# Altium PCB DryBox.PcbDoc
Units mm, origin at the board's own origin, x right, y up, seen from the top; angles counter-clockwise.
Board outline 48.4 x 55.54 mm, 2 copper layers (Top Layer, Bottom Layer); 58 components, 30 nets, 190 pads, 16 vias.
Unrouted connection lines stored in the file: 4.
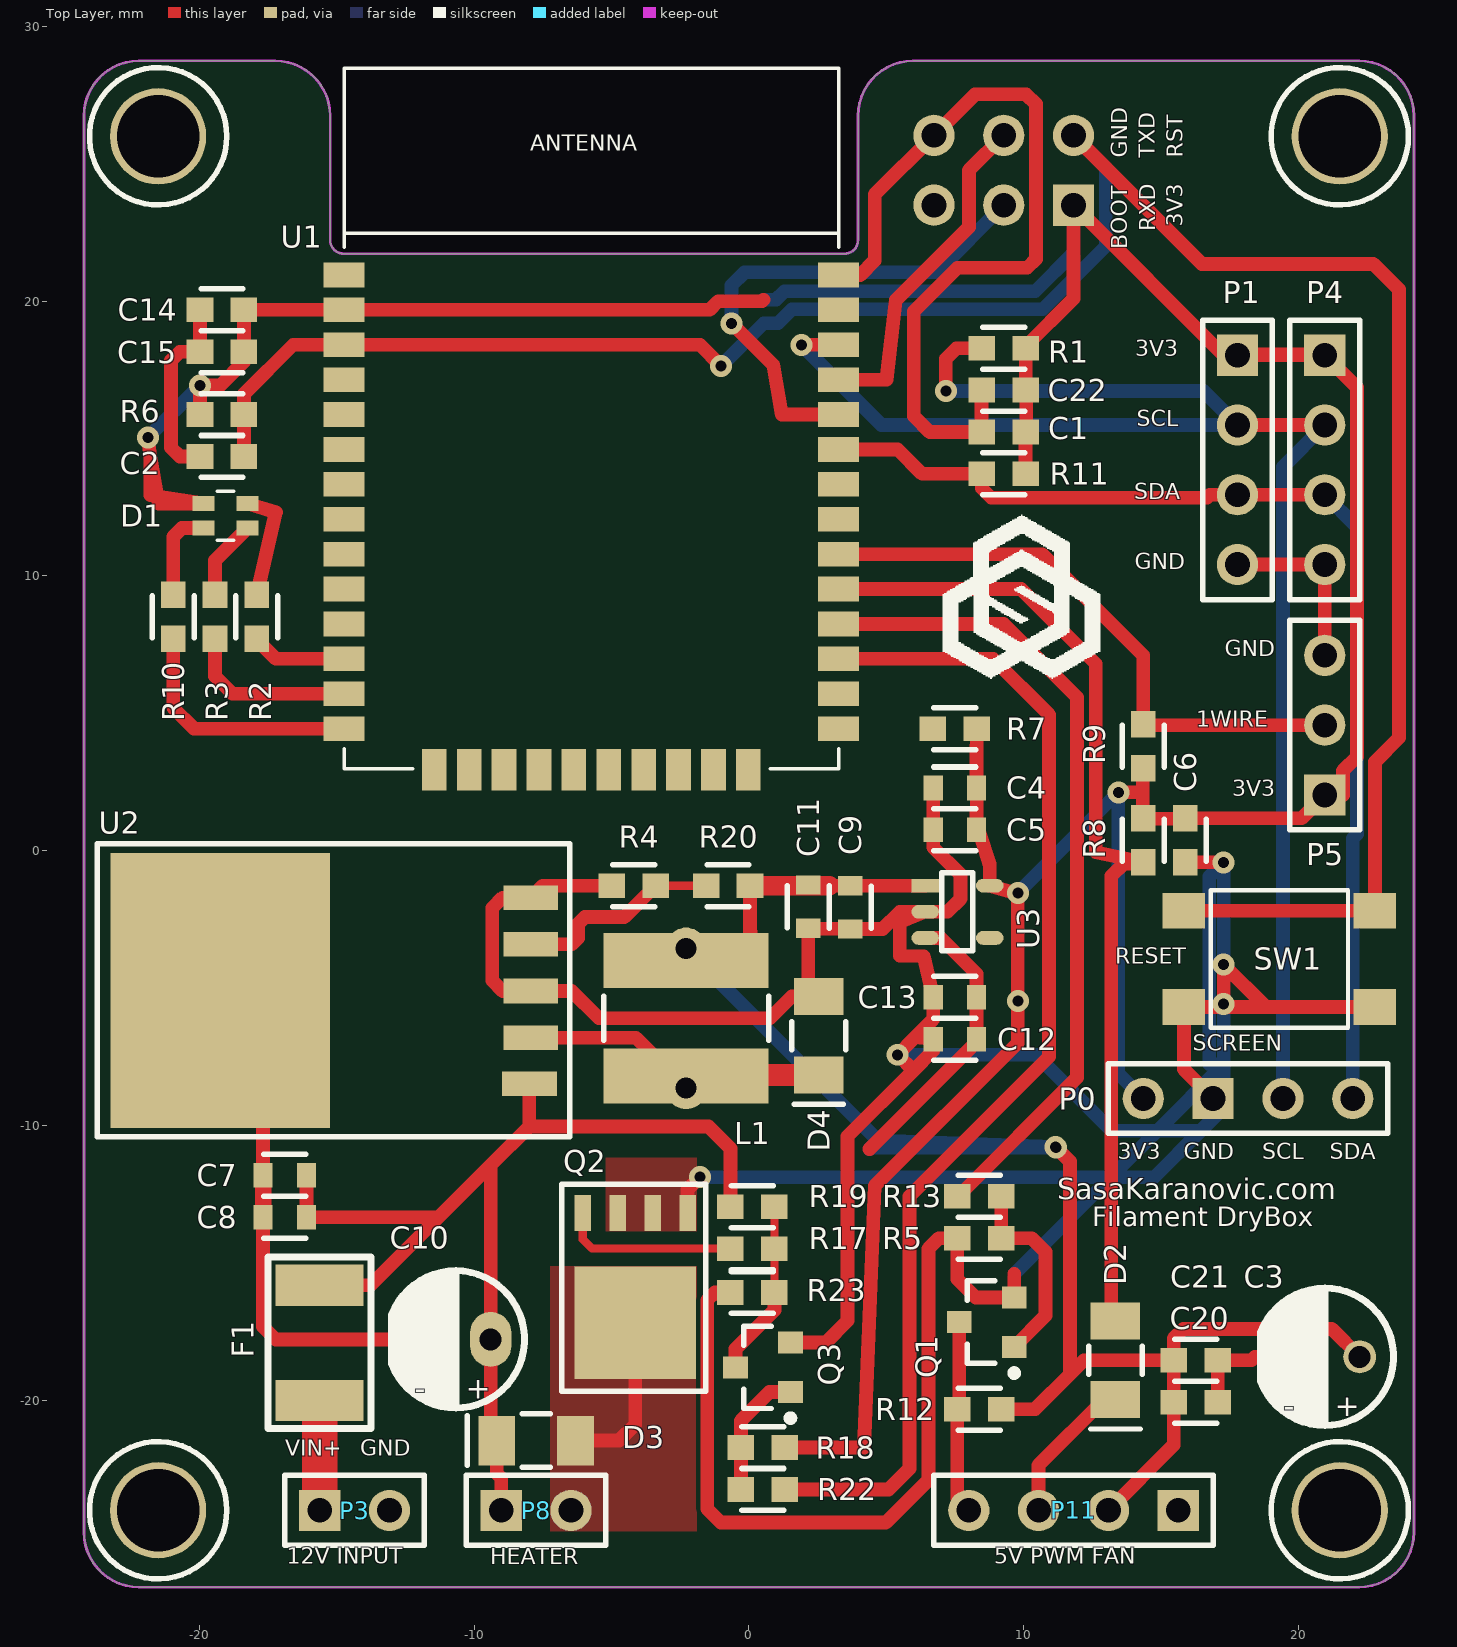
[diagram p0: Top Layer view]
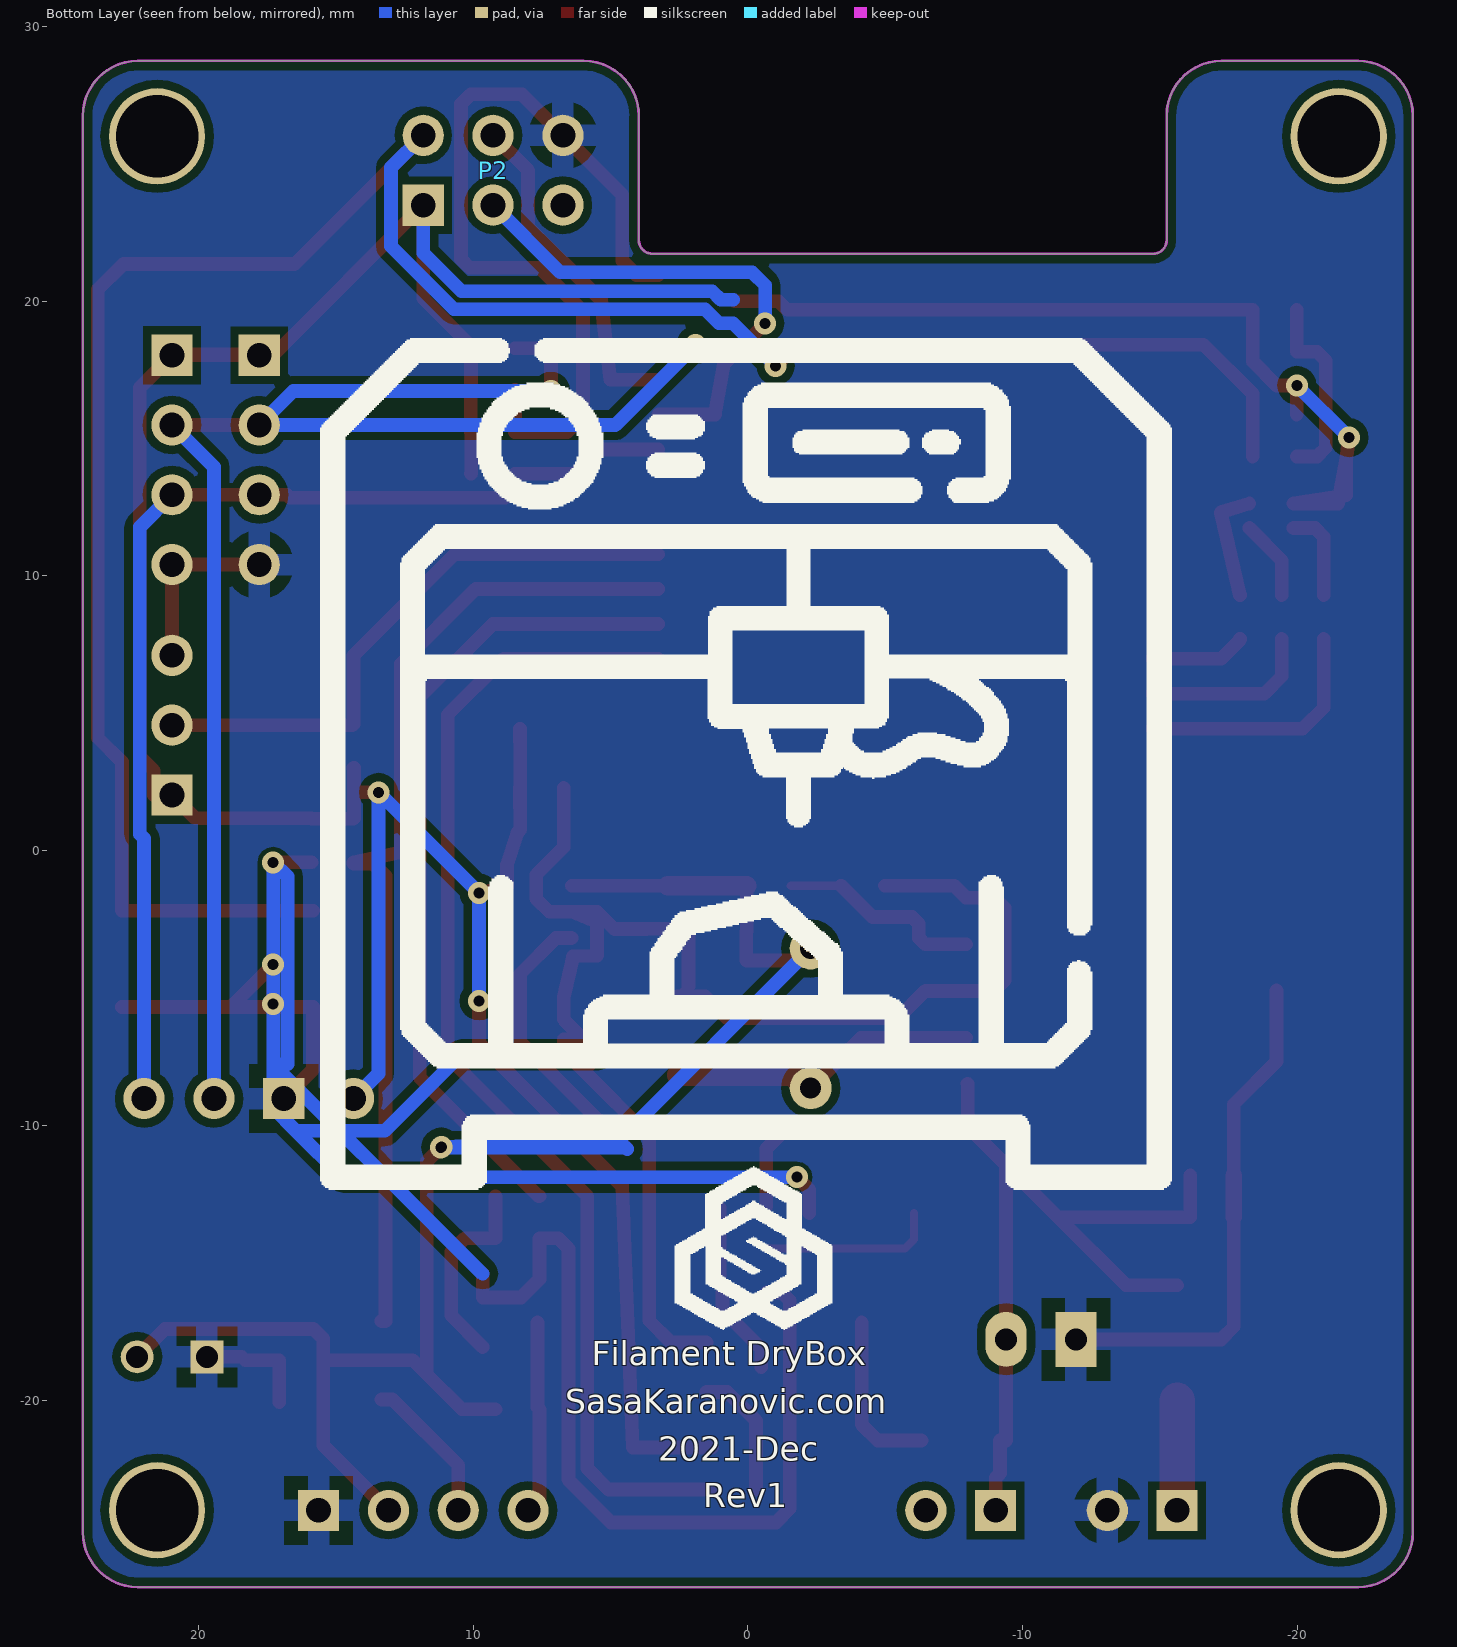
[diagram p1: Bottom Layer view, seen from below]
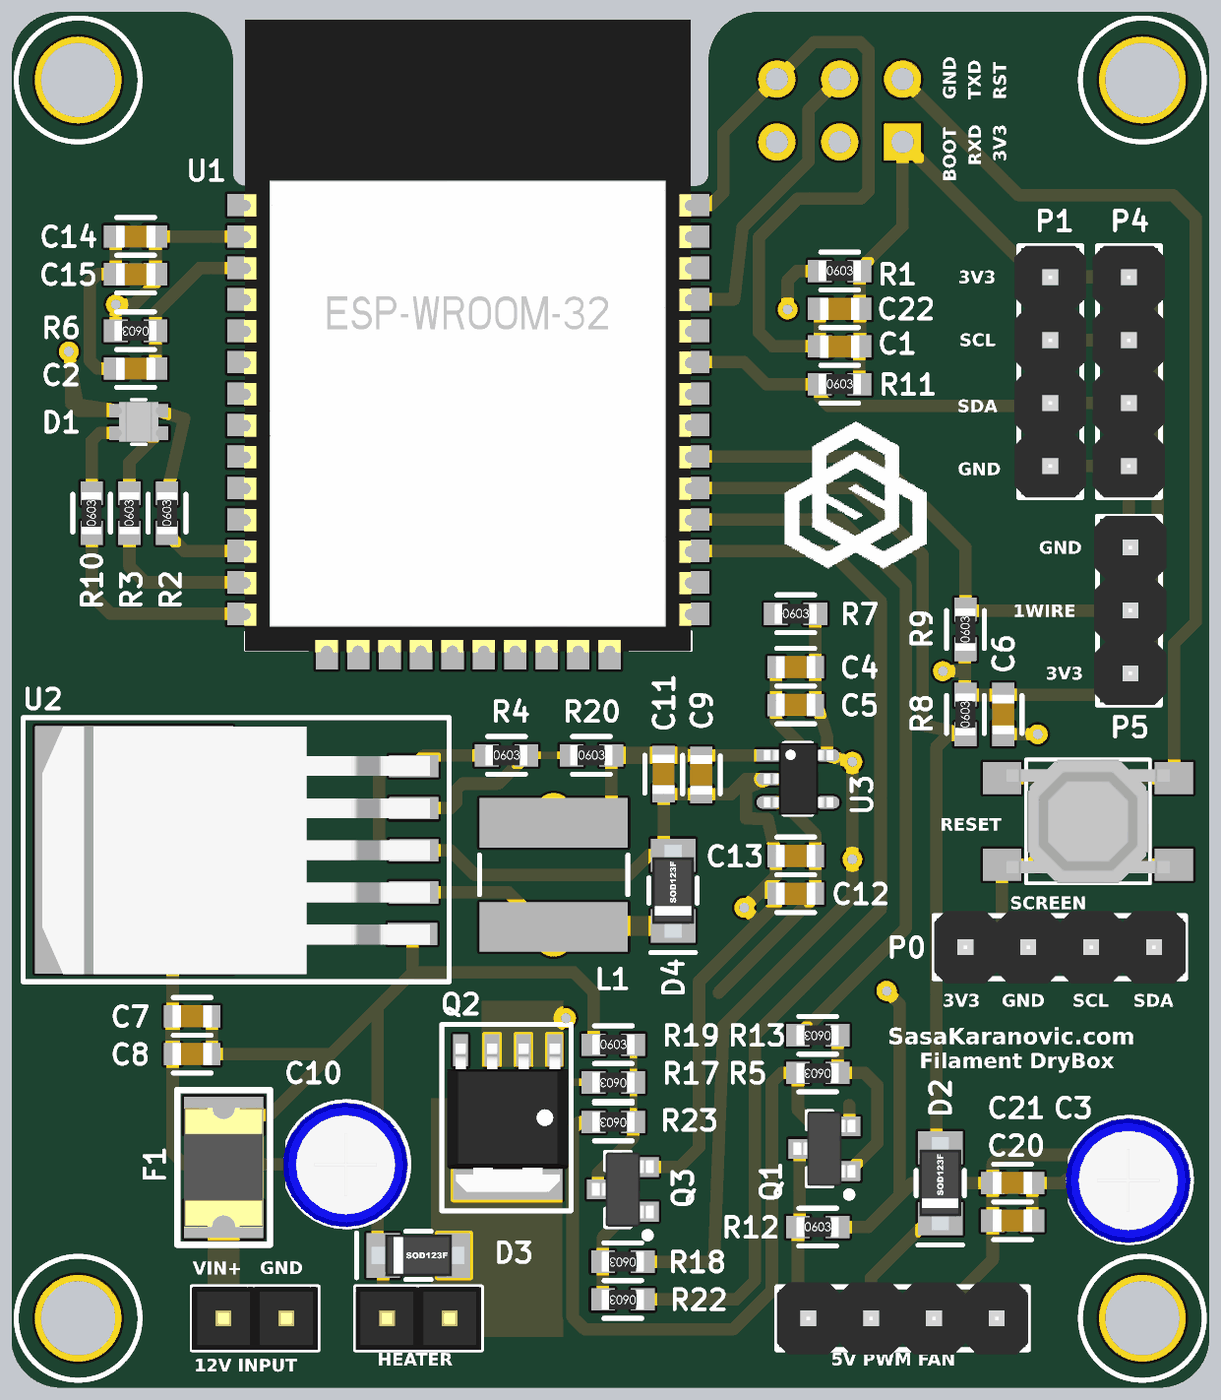
[diagram p2: 3D render of the assembled board from above, using the file's embedded part models]

## Layer stack, top to bottom
Top Solder: solder mask 0.0102, Solder Resist, Dk 3.5
Top Layer: signal copper 0.0356
Dielectric 1: dielectric 0.32, FR-4, Dk 4.8
Bottom Layer: signal copper 0.0356
Bottom Solder: solder mask 0.0102, Solder Resist, Dk 3.5

## Board outline
-24.2,-24.797 ccw(c-22.2,-24.797) -22.2,-26.797 22.2,-26.797 ccw(c22.2,-24.797) 24.2,-24.797 24.2,26.746 ccw(c22.2,26.746) 22.2,28.746 5.969,28.746 ccw(c5.969,26.746) 3.969,26.746 3.969,22.225 cw(c3.469,22.225) 3.469,21.725 -14.74,21.725 cw(c-14.74,22.225) -15.24,22.225 -15.24,26.746 ccw(c-17.24,26.746) -17.24,28.746 -22.2,28.746 ccw(c-22.2,26.746) -24.2,26.746

## Design rules (kind name [scope] priority, off if disabled: settings)
Clearance Clearance_1 [InNamedPolygon('GND_L02_P000')] p1: gap=0.3 ignorepadtopadclearanceinfootprint=FALSE
Clearance [All] p2: gap=0.152 ignorepadtopadclearanceinfootprint=FALSE
HoleSize [All] p1: absolutevalues=TRUE maxlimit=55 minlimit=0.4 maxpercent=80.000 minpercent=20.000
MinimumSolderMaskSliver [All] p1 off: minsoldermaskwidth=0.254
PolygonConnect PolygonConnect_2 [All vs IsNamedPolygon('GND_L01_P002')] p1: connectstyle=Direct reliefconductorwidth=0.254 reliefentries=4 polygonreliefangle="90 Angle" airgapwidth=0.254
PolygonConnect PolygonConnect_1 [All vs IsNamedPolygon('NETD3_A_L01_P001')] p2: connectstyle=Direct reliefconductorwidth=0.254 reliefentries=4 polygonreliefangle="90 Angle" airgapwidth=0.254
PolygonConnect [All] p3: thpad.connectstyle=Relief thpad.reliefconductorwidth=0.8 thpad.reliefentries=4 thpad.polygonreliefangle="90 Angle" thpad.airgapwidth=0.5 smdpad.connectstyle=Relief smdpad.reliefconductorwidth=0.5 smdpad.reliefentries=4 smdpad.polygonreliefangle="90 Angle" smdpad.airgapwidth=0.3 via.connectstyle=Direct via.reliefconductorwidth=0.254 via.reliefentries=4 via.polygonreliefangle="90 Angle" via.airgapwidth=0.254
RoutingVias [All] p1: holewidth=0.4 width=0.8 viastyle="Through Hole" minholewidth=0.4 minwidth=0.6 maxholewidth=50 maxwidth=100
SilkToSilkClearance [All] p1 off: silktosilkclearance=0.254
SilkToSolderMaskClearance [IsPad] p1 off: minsilkscreentomaskgap=0.254 clearancetoexposedcopper=TRUE
SolderMaskExpansion [All] p1: expansion=0.102 istentingtop=FALSE
Width [All] p1: maxlimit=50 minlimit=0.15 preferedwidth=0.5
26 further rules are at their usual default settings.

## Components (designator, comment, footprint, x,y, rotation, side; value= is the part's Value field where it differs from the comment)
C1 "Cap" "0603 - CAP HS" 9.271,15.24 r180 top value=1u
C2 "Cap" "0603 - CAP HS" -19.177,14.351 r180 top value=1u
C3 "25V" "Electrolytic Cap 2.54mm"#1 20.955,-18.415 r180 top value=100uF
C4 "Cap" "0603 - CAP" 7.493,2.286 r0 top value=1n
C5 "Cap" "0603 - CAP" 7.493,0.762 r0 top value=1n
C6 "Cap" "0603 - CAP HS" 15.875,0.381 r270 top value=1u
C7 "Cap" "0603 - CAP" -16.891,-11.811 r0 top value=1n
C8 "Cap" "0603 - CAP" -16.891,-13.335 r0 top value=1n
C9 "Cap" "0603 - CAP" 3.683,-2.06 r90 top value=1n
C10 "25V" "Electrolytic Cap 2.54mm"#2 -10.668,-17.78 r180 top value=100uF
C11 "Cap" "0603 - CAP" 2.159,-2.032 r90 top value=1n
C12 "Cap" "0603 - CAP" 7.493,-6.858 r0 top value=1n
C13 "Cap" "0603 - CAP" 7.493,-5.334 r0 top value=1n
C14 "Cap" "0603 - CAP HS" -19.177,19.685 r180 top value=1u
C15 "Cap" "0603 - CAP HS" -19.177,18.161 r180 top value=1u
C20 "Cap" "0603 - CAP HS" 16.256,-20.066 r0 top value=1u
C21 "Cap" "0603 - CAP HS" 16.256,-18.542 r0 top value=1u
C22 "Cap" "0603 - CAP HS" 9.271,16.764 r180 top value=1u
D1 "RGB LED" "RGB LED - 0606 (1616 Metric)" -19.05,12.192 r180 top
D2 "Diode Schotky" SOD123F 13.335,-18.542 r270 top
D3 "Diode Schotky" SOD123F -7.747,-21.463 r180 top
D4 "Diode Schotky" SOD123F 2.54,-6.731 r270 top
F1 "Fuse Thermal" 1812F -15.621,-17.907 r270 top
L1 "Inductor" IND_TH_SMD -2.286,-6.096 r90 top value=10mH
P0 "Header 4" "Header 4x1"#1 14.351,-9.017 r0 top
P1 "Header 4" "Header 4x1"#2 17.78,18.034 r270 top
P2 "Header 3X2" HDR2X3 11.811,23.495 r180 bottom
P3 "Header 2" "Header 2x1" -15.621,-24.003 r0 top
P4 "Header 4" "Header 4x1"#2 20.955,18.034 r270 top
P5 "Header 3" "Header 3x1" 20.955,2.032 r90 top
P8 "Header 2" "Header 2x1" -9.017,-24.003 r0 top
P11 "Header 4" "Header 4x1"#2 15.621,-24.003 r180 top
Q1 "DMN62D0U-13" SOT90P240X100-3N 8.652,-17.156 r180 top
Q2 "PSMN9R1-30YL" LFPAK-8 -4.191,-15.24 r270 top
Q3 "DMN62D0U-13" SOT90P240X100-3N 0.508,-18.796 r180 top
R1 "Res" "0603 - HS" 9.271,18.288 r0 top value=2K2
R2 "Res" "0603 - HS" -17.907,8.509 r90 top value=220R
R3 "Res" "0603 - HS" -19.431,8.509 r90 top value=220R
R4 "Res" "0603 - HS" -4.191,-1.27 r0 top value=2R2
R5 "Res" "0603 - HS" 8.382,-14.097 r180 top value=2R2
R6 "Res" "0603 - HS" -19.177,15.875 r180 top value=4K7
R7 "Res" "0603 - HS" 7.493,4.445 r0 top value=4K7
R8 "Res" "0603 - HS" 14.351,0.381 r90 top value=2R2
R9 "Res" "0603 - HS" 14.351,3.81 r90 top value=4K7
R10 "Res" "0603 - HS" -20.955,8.509 r90 top value=220R
R11 "Res" "0603 - HS" 9.271,13.716 r0 top value=2K2
R12 "Res" "0603 - HS" 8.382,-20.32 r0 top value=2R2
R13 "Res" "0603 - HS" 8.382,-12.573 r180 top value=100R
R17 "Res" "0603 - HS" 0.127,-14.478 r180 top value=100R
R18 "Res" "0603 - HS" 0.508,-21.717 r180 top value=10K
R19 "Res" "0603 - HS" 0.127,-12.954 r0 top value=1K
R20 "Res" "0603 - HS" -0.762,-1.27 r0 top value=2R2
R22 "Res" "0603 - HS" 0.508,-23.241 r180 top value=100R
R23 "Res" "0603 - HS" 0.127,-16.075 r180 top value=10K
SW1 "SWITCH TACTILE SPST-NO 0.05A 12V" 5MM_5MM_SWITCH_SMT 19.304,-3.937 r0 top
U1 "ESP32 Module" ESP32-WROOM-32 -14.732,20.955 r0 top locked
U2 "LM2576-xx" TO263-5 -15.24,-5.08 r90 top
U3 "MIC5365-1.8YD5-TR" "SOT-23-5 - duplicate" 6.413,-1.27 r0 top

## Footprints (in the part's own frame and the unit in brackets; to place one, negate y for a bottom-side part, rotate by r counter-clockwise, add the part's x,y. Pads: shape width x height; smd on the part's side, far side on the other; paste and mask are expansions set on the pad)
5MM_5MM_SWITCH_SMT [mm] "5mm Tact Switch"
  rect 1.55x1.3 smd: 1(-3.475,1.75) 2(3.475,1.75) 3(-3.475,-1.75) 4(3.475,-1.75)
  silkscreen extent -2.5,-2.5 2.5,2.5, body extent -3.3,-2.5 3.3,2.5, height 1.52
"0603 - CAP" [mm]
  rect 0.7x0.9 smd: 1(-0.79,0) 2(0.79,0)
  silkscreen extent -0.76,-0.76 0.76,0.76, body extent -0.8,-0.44 0.8,0.46, height 0.8
"0603 - CAP HS" [mm]
  rect 0.965x0.9 smd: 1(-0.8,0) 2(0.8,0)
  silkscreen extent -0.76,-0.76 0.76,0.76, body extent -0.8,-0.44 0.8,0.46, height 0.8
"0603 - HS" [mm]
  rect 0.965x0.9 smd: 1(-0.8,0) 2(0.8,0)
  silkscreen extent -0.76,-0.76 0.76,0.76, body extent -0.85,-0.4 0.85,0.4, height 0.56
1812F [mm] "1812 Fuse Footprint"
  rect 1.5x3.2 smd: 1(-2.1,0) 2(2.1,0)
  silkscreen extent -3.12,-1.87 3.12,1.87, body extent -2.41,-1.61 2.41,1.61, height 1.32
"Electrolytic Cap 2.54mm"#1 [mm] "Elektrolitski kondenzator, razmak 2.54mm"
  round 1.2 hole 0.8: 1(-1.27,0)
  rect 1.2x1.2 hole 0.8: 2(1.27,0)
  silkscreen extent -2.5,-2.5 2.33,2.5, body extent -2.5,-2.5 2.55,2.55, height 3.07
"Electrolytic Cap 2.54mm"#2 [mm] "Elektrolitski kondenzator, razmak 2.54mm"
  oval 1.5x2 hole 0.8: 1(-1.27,0)
  rect 1.5x2 hole 0.8: 2(1.27,0)
  silkscreen extent -2.5,-2.5 2.33,2.5, body extent -2.5,-2.5 2.55,2.55, height 3.07
ESP32-WROOM-32 [mm]
  rect 1.5x0.9 smd: 1(0,0) 1(0,0) 2(0,-1.27) 3(0,-2.54) 4(0,-3.81) 5(0,-5.08) 6(0,-6.35) 7(0,-7.62) 8(0,-8.89) 9(0,-10.16) 10(0,-11.43) 11(0,-12.7) 12(0,-13.97) 13(0,-15.24) 14(0,-16.51) 25(17.99,-16.51) 25(17.99,-16.51) 26(17.99,-15.24) 27(17.99,-13.97) 28(17.99,-12.7) 29(17.99,-11.43) 30(17.99,-10.16) 31(17.99,-8.89) 32(17.99,-7.62) 33(17.99,-6.35) 34(17.99,-5.08) 35(17.99,-3.81) 36(17.99,-2.54) 37(17.99,-1.27) 38(17.99,0)
  rect 0.9x1.5 smd: 15(3.28,-18.01) 15(3.28,-18.01) 16(4.55,-18.01) 17(5.82,-18.01) 18(7.09,-18.01) 19(8.36,-18.01) 20(9.63,-18.01) 21(10.9,-18.01) 22(12.17,-18.01) 23(13.44,-18.01) 24(14.71,-18.01)
  silkscreen extent 0,-17.97 18,7.52, body extent -0.06,-18.07 18.01,7.47, height 3.1
HDR2X3 [mm] "Connector; Header; 3x2 Position"
  rect 1.5x1.5 hole 0.9: 1(0,0)
  round 1.5 hole 0.9: 2(0,2.54) 3(2.54,0) 4(2.54,2.54) 5(5.08,0) 6(5.08,2.54)
"Header 2x1" [mm] "Jumper 2x2,54mm"
  rect 1.5x1.5 hole 0.9: 1(0,0)
  round 1.5 hole 0.9: 2(2.54,0)
  silkscreen extent -1.27,-1.27 3.81,1.27, body extent -1.28,-1.27 3.8,1.27, height 8.49
"Header 3x1" [mm] "Connector; Header; 3 Position"
  rect 1.5x1.5 hole 0.9: 1(0,0)
  round 1.5 hole 0.9: 2(2.54,0) 3(5.08,0)
  silkscreen extent -1.27,-1.27 6.35,1.27, body extent -1.26,-1.52 6.36,1.4, height 3.18
"Header 4x1"#1 [mm] "Connector; Header; 4 Position"
  round 1.5 hole 0.9: 1(0,0) 3(5.08,0) 4(7.62,0)
  rect 1.5x1.5 hole 0.9: 2(2.54,0)
  silkscreen extent -1.27,-1.27 8.89,1.27, body extent -1.27,-1.46 8.89,1.46, height 8.51
"Header 4x1"#2 [mm] "Connector; Header; 4 Position"
  rect 1.5x1.5 hole 0.9: 1(0,0)
  round 1.5 hole 0.9: 2(2.54,0) 3(5.08,0) 4(7.62,0)
  silkscreen extent -1.27,-1.27 8.89,1.27, body extent -1.27,-1.46 8.89,1.46, height 8.51
IND_TH_SMD [mil]
  round 60 hole 30 mask+4: 1(-100,0) 2(100,0)
  rect 78.74x236.22 smd: 1(-82.68,0) 2(82.68,0)
  silkscreen extent -31,-118 31,118
LFPAK-8 [mm] "LFPAK Power Pack"
  rect 4.1x4.41 smd: D(1.93,0.051)
  rect 1.3x0.6 smd: G(-2.057,-1.854) S(-2.057,1.956) S(-2.057,-0.584) S(-2.057,0.686)
  silkscreen extent -3.1,-2.62 4.42,2.62, body extent -2.34,-2.4 3.66,2.5, height 1.1
"RGB LED - 0606 (1616 Metric)" [mm] "4-SMD - 1.60mm L x 1.60mm W"
  rect 0.8x0.55 smd: 1(-0.8,-0.45) 2(-0.8,0.45) 3(0.8,0.45) 4(0.8,-0.45)
  silkscreen extent -0.3,-0.9 0.3,0.9, body extent -0.8,-0.8 0.8,0.8, height 0.46
SOD123F [mm]
  rect 1.34x1.8 smd: A(-1.43,0) K(1.43,0)
  silkscreen extent -0.51,-0.98 2.5,0.98, body extent -1.85,-0.85 1.9,0.85, height 1.2
SOT90P240X100-3N [mm] "SOT23, 3-Leads, Body 2.90x2.40mm, Pitch 0.90mm, IPC Medium Density"
  rect 0.9x0.8 smd: 1(-1,0.9) 2(-1,-0.9) 3(1,0)
  silkscreen extent -1.13,-1.5 0.7,1.97, body extent -1.25,-1.5 1.25,1.5, height 1
"SOT-23-5 - duplicate" [mm]
  rect 1x0.5 smd: 1(0,0)
  oval 1x0.5 smd: 2(0,-0.95) 3(0,-1.9) 4(2.35,-1.9) 5(2.35,0)
  silkscreen extent 0.61,-2.38 1.73,0.48, body extent -0.21,-2.4 2.59,0.5, height 1.45
TO263-5 [mm] "TO263-5 SMT package"
  rect 0.9x2 smd: 1(-3.4,-7.25) 2(-1.725,-7.3) 3(-0.025,-7.3) 4(1.675,-7.3) 5(3.375,-7.3)
  rect 10x8 smd: 3(0,4)
  silkscreen extent -5.33,-8.73 5.33,8.48, body extent -5.02,-7.96 4.98,7.71, height 4.78

## Part data
C1 C2 C4 C5 C6 C7 C8 C9 C11 C12 C13 C14 C15 C20 C21 C22: "Capacitor"
C3 C10: library part "Cap Electrolytic", "Polarized Capacitor (Axial)"
D1: library part EAST1616RGBB2, "Red, Green, Blue (RGB) - LED Indication - Discrete 1.9V Red, 2.8V Green, 2.8V Blue 0606 (1616 Metric)", Distributor Part Number=1080-1551-1-ND, Manufacturer="Everlight Electronics Co Ltd", Distributor=DigiKey, Manufacturer Part Number=EAST1616RGBB2
F1: "Thermal Fuse", LatestRevisionDate=17-Jul-2002, LatestRevisionNote="Re-released for DXP Platform.", PackageDescription="Thru-Hole; 2 Leads", PackageReference=PIN-W2/E2.8, Published=24-Mar-1999, Publisher="Altium Limited"
P0 P1 P4 P11: "Header, 4-Pin"
P2: "Header, 3-Pin, Dual row", LatestRevisionDate=17-Jul-2002, LatestRevisionNote="Re-released for DXP Platform.", Publisher="Altium Limited"
P3 P8: "Header, 2-Pin"
  P3: LatestRevisionDate=17-Jul-2002, LatestRevisionNote="Re-released for DXP Platform.", Publisher="Altium Limited"
P5: "Header, 3-Pin"
Q1 Q3: "MOSFET N-CH 60V 0.38A", Distributor Part Number=DMN62D0U-13DICT-ND, Manufacturer="Diodes Incorporated", Distributor=DigiKey, Manufacturer Part Number=DMN62D0U-13
Q2: "MOSFET N-CH 30V 37A LFPAK", Manufacturer="Nexperia USA Inc.", Manufacturer Part Number=PSMN011-30YLC,115, Distributor=DigiKey
R1 R2 R3 R4 R5 R6 R7 R8 R9 R10 R11 R12 R13 R17 R18 R19 R20 R22 R23: "Resistor", LatestRevisionDate=17-Jul-2002, LatestRevisionNote="Re-released for DXP Platform.", PackageDescription="Axial Device, Thru-Hole; 2 Leads; 0.3 in Pin Spacing", PackageReference=AXIAL-0.3, Published=8-Jun-2000, Publisher="Altium Limited"
SW1: library part "PTS645SL50SMTR92 LFS", Distributor Part Number=CKN9088CT-ND, Manufacturer=C&K, Distributor=DigiKey, Manufacturer Part Number="PTS645SL50SMTR92 LFS"
U1: library part ESP32_Module
U2: "Switching mode regulator [ 3v3, 5v, 12v and ADJ ]"
U3: "High-Performance Single 1.8V@150mA LDO", Distributor Part Number=576-4082-1-ND, Distributor=DigiKey, Manufacturer Part Number=MIC5365-1.8YD5-TR

## Free pads (board coordinates)
  round 3.5 hole 3 unplated: ""(-21.5,-24) ""(-21.5,26) ""(21.5,-24) ""(21.5,26)

## Via types
v1: diameter 0.8, hole 0.4, Top Layer to Bottom Layer, 16 vias

## Nets (pads, with @x,y where several pads share a name; then routed paths per layer and width w, separated by ;. In a path a pad name is that pad's centre, name@x,y a point inside that pad or via, vN(x,y) a via of type N, cw(c..) or ccw(c..) an arc to the next point about the centre after c; other vN are vias at no path point)
3V3: C1.1 C4.2 C5.2 C6.1 C14.1 C15.1 C22.1 D1.4 P0.1 P1.1 P2.1 P4.1 P5.1 R1.2 R6.2 R7.2 R8.2 R9.1 R11.2 R18.1 U1.2 U3.5 | length 156.6
  Top Layer w0.5: v1(-21.878,15.035) -21.774,14.255 ; R6.2 v1(-19.977,16.936) -19.24,16.936 -18.377,17.799 C15.1 C14.1 U1.2 -1.434,19.685 -1.12,19.999 0.473,19.999 0.531,20.056 ; R18.1 4.188,-21.717 4.575,-12.198 9.782,-6.991 v1(9.782,-5.467) ; R7.2 8.283,3.353 C4.2 8.288,2.281 C5.2 8.383,0.662 8.763,-0.508 U3.5 9.773,-1.561 9.779,-1.563 v1(9.782,-5.467) ; v1(9.782,-1.53) v1(9.782,-5.467) ; R11.2 10.062,13.716 10.062,15.24 C1.1 10.087,15.24 10.087,16.764 C22.1 R1.2 10.071,18.358 11.811,20.098 P2.1 17.272,18.034 P1.1 ; v1(13.44,2.127) 14.329,2.127 ; R9.1 14.329,3.01 14.329,2.127 ; -21.774,14.255 -21.527,12.897 ; -21.774,14.255 -21.774,12.935 -21.527,12.897 ; -21.527,12.897 -21.481,12.642 D1.4 -21.527,12.897 ; 14.329,2.127 14.329,1.181 R8.2 14.351,1.162 15.875,1.162 C6.1 20.104,1.181 P5.1 21.619,2.032 21.619,2.915 22.127,3.423 22.127,16.862 P4.1 ; P1.1 17.818,18.072 20.917,18.072 P4.1 ; P1.1 P4.1
  Bottom Layer w0.5: v1(-21.878,15.035) v1(-19.977,16.936) ; 0.531,20.056 0.99,20.056 1.293,20.359 10.42,20.359 11.811,21.751 P2.1 ; v1(9.782,-5.467) v1(9.782,-1.53) v1(13.44,2.127) 13.44,-8.106 P0.1
5V: C3.1 C9.2 C11.2 C12.2 C13.2 C20.1 C21.1 L1.2 P11.2 R12.2 R20.2 U3.1 U3.3 | length 76.3
  Top Layer w0.5: L1.2@-2.286,-3.556 -2.286,-3.996 0.054,-3.996 0.054,-2.943 0.038,-2.927 R20.2 ; C11.2 2.899,-1.242 2.927,-1.27 C9.2 U3.1 ; 4.388,-10.853 8.283,-6.958 C12.2 C13.2 8.283,-4.473 6.98,-3.17 U3.3 ; R12.2 10.414,-20.32 11.684,-19.05 ; v1(11.157,-10.776) v1(11.176,-10.795) 11.684,-11.303 11.684,-19.05 ; P11.2 15.456,-21.628 C20.1 C21.1 ; C3.1 21.212,-17.402 15.802,-17.402 15.456,-17.748 C21.1 ; 11.684,-19.05 12.192,-18.542 C21.1
  Top Layer w0.7: R20.2 2.927,-1.27
  Bottom Layer w0.5: L1.2@-2.286,-3.556 4.699,-10.542 v1(11.157,-10.776) ; 4.388,-10.853 4.446,-10.795 v1(11.176,-10.795)
12V: C7.2 C8.2 C10.1 D3.K F1.1 P8.1 R19.1 U2.1 | length 40.5
  Top Layer w0.5: C7.2 C8.2 -11.292,-13.335 ; F1.1 -13.764,-15.807 -11.292,-13.335 ; P8.1 -9.017,-22.815 -9.177,-22.655 D3.K -9.398,-21.463 C10.1 -9.398,-11.441 ; U2.1 -7.998,-8.48 -7.998,-10.033 -7.99,-10.033 ; R19.1 -0.673,-10.833 -1.473,-10.033 -7.99,-10.033 ; -11.292,-13.335 -9.398,-11.441 ; -9.398,-11.441 -7.99,-10.033
BOOT: P2.5 R7.1 U1.25
CTRL_HEATER: R22.1 U1.27 | length 42.9
  Top Layer w0.5: R22.1 5.08,-23.241 5.842,-22.479 5.842,-12.573 10.922,-7.493 10.922,4.953 8.89,6.985 U1.27
FAN_PWM: R13.2 U1.28 | length 29.8
  Top Layer w0.5: U1.28 9.271,8.255 11.938,5.588 11.938,-8.25 7.615,-12.573 R13.2
FAN_PWM_CON: P11.4 Q1.3 R12.1 | length 7
  Top Layer w0.5: Q1.3 7.652,-20.25 R12.1 7.582,-23.584 P11.4
FAN_TACHO: D2.A R8.1 U1.29 | length 36.9
  Top Layer w0.5: U1.29 9.906,9.525 12.622,6.809 12.622,-0.049 R8.1 14.351,-0.463 13.643,-0.463 13.186,-0.921 13.186,-17.112 D2.A
FAN_TACHO_CON: D2.K P11.3 | length 5.4
  Top Layer w0.5: P11.3 10.541,-22.358 12.927,-19.972 D2.K
GND: C1.2 C2.2 C3.2 C4.1 C5.1 C6.2 C7.1 C8.1 C9.1 C10.2 C11.1 C12.1 C13.1 C14.2 C15.2 C20.2 C21.2 C22.2 D4.A P0.2 P1.4 P2.6 P3.2 P4.4 P5.3 P11.1 Q1.2 Q2.S Q3.2 R4.1 R5.2 R23.2 SW1.3 SW1.4 U1.1 U1.15 U1.38 U2.3 U2.5 U3.2 | length 232.1
  Top Layer w0.3: D4.A@2.159,-4.92 D4.A
  Top Layer w0.5: C2.2 -20.71,14.351 -21.028,14.668 -21.028,17.843 -20.71,18.161 C15.2 C14.2 ; U2.3@-19.24,-5.08 -19.24,-7.667 -17.681,-9.226 C7.1 ; C8.1 -17.681,-17.323 -17.218,-17.786 -11.938,-17.786 C10.2 ; R4.1 -7.505,-1.27 U2.5 -8.963,-1.705 -9.344,-2.086 -9.344,-4.724 -8.963,-5.105 -7.94,-5.105 -6.452,-5.105 -5.461,-6.096 0.762,-6.096 1.557,-5.301 D4.A ; Q2.S@-2.235,-13.183 -2.235,-12.325 v1(-1.789,-11.879) ; R23.2 -1.241,-16.075 -1.521,-16.354 -1.521,-23.946 -1.025,-24.441 4.982,-24.441 6.531,-22.892 6.531,-14.478 6.912,-14.097 R5.2 7.582,-15.583 8.255,-16.256 Q1.2 9.652,-15.395 ; Q3.2 2.797,-17.896 3.589,-17.105 3.589,-10.391 5.985,-7.994 ; D4.A@2.159,-4.92 C11.1 2.173,-2.836 3.669,-2.836 C9.1 4.86,-2.85 5.49,-2.22 U3.2 ; U1.38 4.055,20.955 4.575,21.476 4.575,23.879 P2.6 8.223,27.527 10.087,27.527 10.443,27.172 10.443,21.533 10.125,21.216 7.586,21.216 5.999,19.628 5.999,15.818 6.577,15.24 C1.2@8.461,15.24 ; C4.1 C5.1 6.703,0.127 7.699,-0.87 7.699,-1.75 7.23,-2.22 U3.2 ; C1.2 C1.2@8.461,15.24 ; C22.2 8.461,16.764 C1.2@8.461,15.24 ; C6.2 v1(17.275,-0.419) ; P0.2 15.829,-7.955 SW1.3 17.157,-5.687 v1(17.275,-5.569) ; C20.2 C21.2 18.291,-18.542 18.418,-18.415 C3.2 ; P1.4 P4.4 P5.3 ; SW1.4 18.816,-5.687 ; 5.985,-7.994 6.703,-7.276 C12.1 6.048,-6.788 ; 5.985,-7.994 v1(5.413,-7.423) 6.048,-6.788 ; 6.048,-6.788 6.703,-6.133 C13.1 6.36,-3.842 5.49,-3.816 5.49,-2.597 U3.2 ; v1(17.275,-5.569) v1(17.275,-4.146) 18.816,-5.687 ; v1(17.275,-5.569) 17.275,-5.687 18.816,-5.687
  Top Layer w0.6: C8.1 C7.1
  Bottom Layer w0.5: v1(-1.789,-11.879) 13.168,-11.879 ; v1(5.413,-7.423) 10.443,-7.423 13.211,-10.192 14.856,-10.192 ; 9.652,-15.395 13.168,-11.879 ; 13.168,-11.879 14.856,-10.192 ; 13.168,-11.879 14.75,-11.879 16.437,-10.192 ; 14.856,-10.192 17.275,-7.772 ; 14.856,-10.192 16.437,-10.192 ; 16.437,-10.192 17.251,-9.377 17.275,-9.353 17.275,-9.017 17.275,-7.772 ; 17.275,-7.772 v1(17.275,-5.569) v1(17.275,-4.146) v1(17.275,-0.419) 16.755,-0.94 16.755,-7.772 17.275,-7.772
NetD1_1: D1.1 R2.2 | length 4.2
  Top Layer w0.5: D1.1 -17.214,12.321 R2.2
NetD1_2: D1.2 R3.2 | length 2.9
  Top Layer w0.5: R3.2 -19.431,10.561 D1.2
NetD1_3: D1.3 R10.2 | length 3.4
  Top Layer w0.5: R10.2 -20.955,11.424 -20.637,11.742 D1.3
NetD3_A: D3.A P8.2 Q2.D | length 6.1
  Top Layer w0.5: D3.A -4.726,-21.463 -4.14,-20.877 Q2.D
NetD4_K: D4.K L1.1 U2.2 | length 11.9
  Top Layer w0.5: U2.2 -4.117,-6.805 -2.286,-8.636 L1.1@-2.286,-8.196
  Top Layer w0.8: L1.1@-2.286,-8.636 -2.09,-8.636 -1.968,-8.514 -1.615,-8.161 D4.K
NetF1_2: F1.2 P3.1 | length 4
  Top Layer w1.3: P3.1 F1.2
NetQ1_1: Q1.1 R5.1 R13.1 | length 7.3
  Top Layer w0.5: R13.1 R5.1 10.287,-14.097 10.795,-14.605 10.795,-16.913 Q1.1
NetQ2_G: Q2.G R17.2 | length 6.5
  Top Layer w0.3: Q2.G -6.045,-14.148 -5.715,-14.478 R17.2
NetQ3_1: Q3.1 R18.2 R22.2 | length 4.7
  Top Layer w0.5: R22.2 R18.2 -0.292,-20.739 0.751,-19.696 Q3.1
NetQ3_3: Q3.3 R17.1 R19.2 R23.1 | length 6.4
  Top Layer w0.3: R23.1 R17.1 R19.2
  Top Layer w0.5: Q3.3 -0.492,-18.129 0.927,-16.71 R23.1
NetR2_1: R2.1 U1.12 | length 3.5
  Top Layer w0.5: R2.1 -17.907,7.677 -17.216,6.985 U1.12
NetR3_1: R3.1 U1.13 | length 6.3
  Top Layer w0.5: R3.1 -19.431,6.35 -18.796,5.715 U1.13
NetR4_2: R4.2 R20.1 U2.4 | length 7.6
  Top Layer w0.3: R4.2 R20.1
  Top Layer w0.5: U2.4 -6.453,-3.405 -6.223,-3.175 -6.223,-2.667 -5.969,-2.413 -4.534,-2.413 R4.2
NetR10_1: R10.1 U1.14 | length 9
  Top Layer w0.5: R10.1 -20.955,5.207 -20.193,4.445 U1.14
nRESET: C2.1 P2.2 R6.1 SW1.1 SW1.2 U1.3 | length 85.1
  Top Layer w0.5: C2.1 R6.1 -18.377,16.621 -16.583,18.415 U1.3 -1.781,18.415 v1(-1.013,17.647) ; P2.2 16.491,21.355 22.723,21.355 23.657,20.421 23.657,4.115 22.779,3.237 SW1.2 SW1.1
  Bottom Layer w0.5: v1(-1.013,17.647) 0.537,19.196 1.053,19.196 1.564,19.707 10.69,19.707 12.983,22 12.983,24.863 P2.2
OW_TEMP_HEATER: P5.2 R9.2 U1.30 | length 21.7
  Top Layer w0.5: U1.30 10.668,10.795 14.351,7.112 R9.2 14.389,4.572 P5.2
RXD: P2.3 U1.34 | length 18.5
  Top Layer w0.5: v1(-0.632,19.196) 0.88,17.685 1.197,15.875 U1.34
  Bottom Layer w0.5: v1(-0.632,19.196) -0.632,20.581 -0.162,21.05 6.826,21.05 P2.3
SCL: P0.3 P1.2 P4.2 R1.1 U1.36 | length 60.5
  Top Layer w0.5: v1(1.908,18.409) 1.914,18.415 U1.36 ; v1(7.166,16.732) 7.166,17.907 7.547,18.288 R1.1 ; P1.2 P4.2
  Bottom Layer w0.5: v1(1.908,18.409) 4.823,15.494 P1.2 16.542,16.732 v1(7.166,16.732) ; P0.3 19.431,13.97 P4.2
SDA: P0.4 P1.3 P4.3 R11.1 U1.33 | length 41.3
  Top Layer w0.5: U1.33 5.413,14.605 6.302,13.716 R11.1 8.471,13.192 8.817,12.846 16.666,12.846 16.773,12.954 P1.3 P4.3
  Bottom Layer w0.5: P4.3 22.127,11.782 22.127,0.603 21.971,0.448 P0.4
TXD: P2.4 U1.35 | length 12.3
  Top Layer w0.5: U1.35 5.007,17.145 5.346,20.043 8.004,22.701 8.004,24.768 P2.4
pads on no net: U1.4 U1.5 U1.6 U1.7 U1.8 U1.9 U1.10 U1.11 U1.16 U1.17 U1.18 U1.19 U1.20 U1.21 U1.22 U1.23 U1.24 U1.26 U1.31 U1.32 U1.37 U3.4

## Polygon pours and split planes (outlines as drawn)
GND on Top Layer "GND_L01_P002" (solid, pour order 2): -5.207,-13.843 -1.905,-13.843 -1.905,-11.176 -5.207,-11.176
NetD3_A on Top Layer "NETD3_A_L01_P001" (solid, pour order 1): -7.239,-15.113 -7.239,-24.765 -1.905,-24.765 -1.905,-15.113
GND on Bottom Layer "GND_L02_P000" (solid, remove dead copper, pour order 0): -24.5,-27 ccw(c-22.5,-27) -22.5,-29 22.5,-29 ccw(c22.5,-27) 24.5,-27 24.5,27 ccw(c22.5,27) 22.5,29 5.969,29 ccw(c5.969,27) 3.969,27 3.969,22.225 cw(c3.469,22.225) 3.469,21.725 -14.74,21.725 cw(c-14.74,22.225) -15.24,22.225 -15.24,27 ccw(c-17.24,27) -17.24,29 -22.5,29 ccw(c-22.5,27) -24.5,27

## Keep-outs
Keep-Out Layer:
  the board outline again, w0.1

## Silkscreen, mask and mechanical layers (free items; w line width, h text height)
Top Overlay:
  drawing of 5 lines, arcs and shapes, not listed
  text "GND" at 13.958,25.216 h1 r90
  text "TXD" at 14.963,25.217 h1 r90
  text "RST" at 15.991,25.215 h1 r90
  text "3V3" at 15.99,22.7 h1 r90
  text "RXD" at 14.986,22.549 h1 r90
  text "BOOT" at 13.958,21.891 h1 r90
  text "3V3" at 14.064,17.792 h1
  text "SCL" at 14.106,15.252 h1
  text "SDA" at 14.023,12.584 h1
  text "GND" at 14.04,10.045 h1
  text "GND" at 17.317,6.87 h1
  text "1WIRE" at 16.275,4.318 h1
  text "3V3" at 17.595,1.79 h1
  text "RESET" at 13.323,-4.307 h1
  text "SCREEN" at 16.147,-7.481 h1
  text "3V3" at 13.429,-11.418 h1
  text "GND" at 15.818,-11.418 h1
  text "SCL" at 18.678,-11.418 h1
  text "SDA" at 21.135,-11.419 h1
  text "SasaKaranovic.com" at 11.215,-12.936 h1.3
  text "Filament DryBox" at 12.487,-13.898 h1.2
  text "GND" at -14.154,-22.213 h1
  text "VIN+" at -16.866,-22.224 h1
  text "12V INPUT" at -16.816,-26.15 h1
  text "5V PWM FAN" at 8.923,-26.15 h1
  text "HEATER" at -9.412,-26.162 h1
Bottom Overlay:
  drawing of 9 lines, arcs and shapes, not listed
  text "Filament DryBox" at 5.687,-19.013 h1.5
  text "SasaKaranovic.com" at 6.648,-20.76 h1.5
  text "2021-Dec" at 3.256,-22.483 h1.5
  text "Rev1" at 1.614,-24.189 h1.5
Drill Drawing:
  drawing of 235 lines, arcs and shapes, not listed
  text "Layer" at 54.752,33.782 h1.52
  text "Name" at 65.163,33.782 h1.52
  text "Material" at 88.779,33.782 h1.52
  text "Thickness" at 110.617,33.782 h1.52
  text "Constant" at 127.123,33.782 h1.52
  text "Board Layer Stack" at 141.597,33.782 h1.52
  text "Top Overlay" at 65.163,30.734 h1.52
  text "Top Solder" at 65.163,27.686 h1.52
  text "Solder Resist" at 88.779,27.686 h1.52
  text "0.010mm" at 110.617,27.686 h1.52
  text "3.5" at 127.123,27.686 h1.52
  text "1" at 54.752,24.638 h1.52
  text "Top Layer" at 65.163,24.638 h1.52
  text "0.036mm" at 110.617,24.638 h1.52
  text "Dielectric 1" at 65.163,21.59 h1.52
  text "FR-4" at 88.779,21.59 h1.52
  text "0.320mm" at 110.617,21.59 h1.52
  text "4.8" at 127.123,21.59 h1.52
  text "2" at 54.752,18.542 h1.52
  text "Bottom Layer" at 65.163,18.542 h1.52
  text "0.036mm" at 110.617,18.542 h1.52
  text "Bottom Solder" at 65.163,15.494 h1.52
  text "Solder Resist" at 88.779,15.494 h1.52
  text "0.010mm" at 110.617,15.494 h1.52
  text "3.5" at 127.123,15.494 h1.52
  text "Bottom Overlay" at 65.163,12.446 h1.52
  text "Symbol" at 55.447,4.028 h1.83
  text "Count" at 68.296,4.028 h1.83
  text "Hole Size" at 82.008,4.028 h1.83
  text "Plated" at 110.448,4.028 h1.83
  text "Hole Type" at 123.297,4.028 h1.83
  text "Via/Pad" at 141.936,4.028 h1.83
  text "Pad Shape" at 156.918,4.028 h1.83
  text "16" at 68.296,0.218 h1.52
  text "0.400mm (15.75mil)" at 82.008,0.218 h1.52
  text "PTH" at 110.448,0.218 h1.52
  text "Round" at 123.297,0.218 h1.52
  text "Via" at 141.936,0.218 h1.52
  text "Rounded" at 156.918,0.218 h1.52
  text "2" at 68.296,-3.592 h1.52
  text "0.762mm (30.00mil)" at 82.008,-3.592 h1.52
  text "PTH" at 110.448,-3.592 h1.52
  text "Round" at 123.297,-3.592 h1.52
  text "Pad" at 141.936,-3.592 h1.52
  text "Rounded" at 156.918,-3.592 h1.52
  text "4" at 68.296,-7.402 h1.52
  text "0.800mm (31.50mil)" at 82.008,-7.402 h1.52
  text "PTH" at 110.448,-7.402 h1.52
  text "Round" at 123.297,-7.402 h1.52
  text "Pad" at 141.936,-7.402 h1.52
  text "(Mixed)" at 156.918,-7.402 h1.52
  text "29" at 68.296,-11.212 h1.52
  text "0.900mm (35.43mil)" at 82.008,-11.212 h1.52
  text "PTH" at 110.448,-11.212 h1.52
  text "Round" at 123.297,-11.212 h1.52
  text "Pad" at 141.936,-11.212 h1.52
  text "(Mixed)" at 156.918,-11.212 h1.52
  text "4" at 68.296,-15.022 h1.52
  text "3.000mm (118.11mil)" at 82.008,-15.022 h1.52
  text "NPTH" at 110.448,-15.022 h1.52
  text "Round" at 123.297,-15.022 h1.52
  text "Pad" at 141.936,-15.022 h1.52
  text "Rounded" at 156.918,-15.022 h1.52
  text "55 Total" at 68.296,-18.832 h1.52

## Dimensions
22.2,-26.797 to 22.2,28.746 on Drill Drawing
-24.2,-24.797 to 24.2,-24.797 on Drill Drawing

## Text inside footprints (layer, text, board x,y; h text height)
C3: Top Overlay "-" at 19.456,-20.599 h0.8; Top Overlay "+" at 21.311,-20.574 h0.8
C10: Top Overlay "+" at -10.312,-19.939 h0.8; Top Overlay "-" at -12.167,-19.964 h0.8
U1: Top Overlay "ANTENNA" at -7.966,25.281 h1